# Altium PCB UKU202045.PcbDoc (part 1 of 3)
Units mm, origin at the board's own origin, x right, y up, seen from the top; angles counter-clockwise.
Board outline 319.2 x 161.95 mm, 2 copper layers (Top Layer, Bottom Layer); 290 components, 381 nets, 912 pads, 545 vias.
Unrouted connection lines stored in the file: 1.
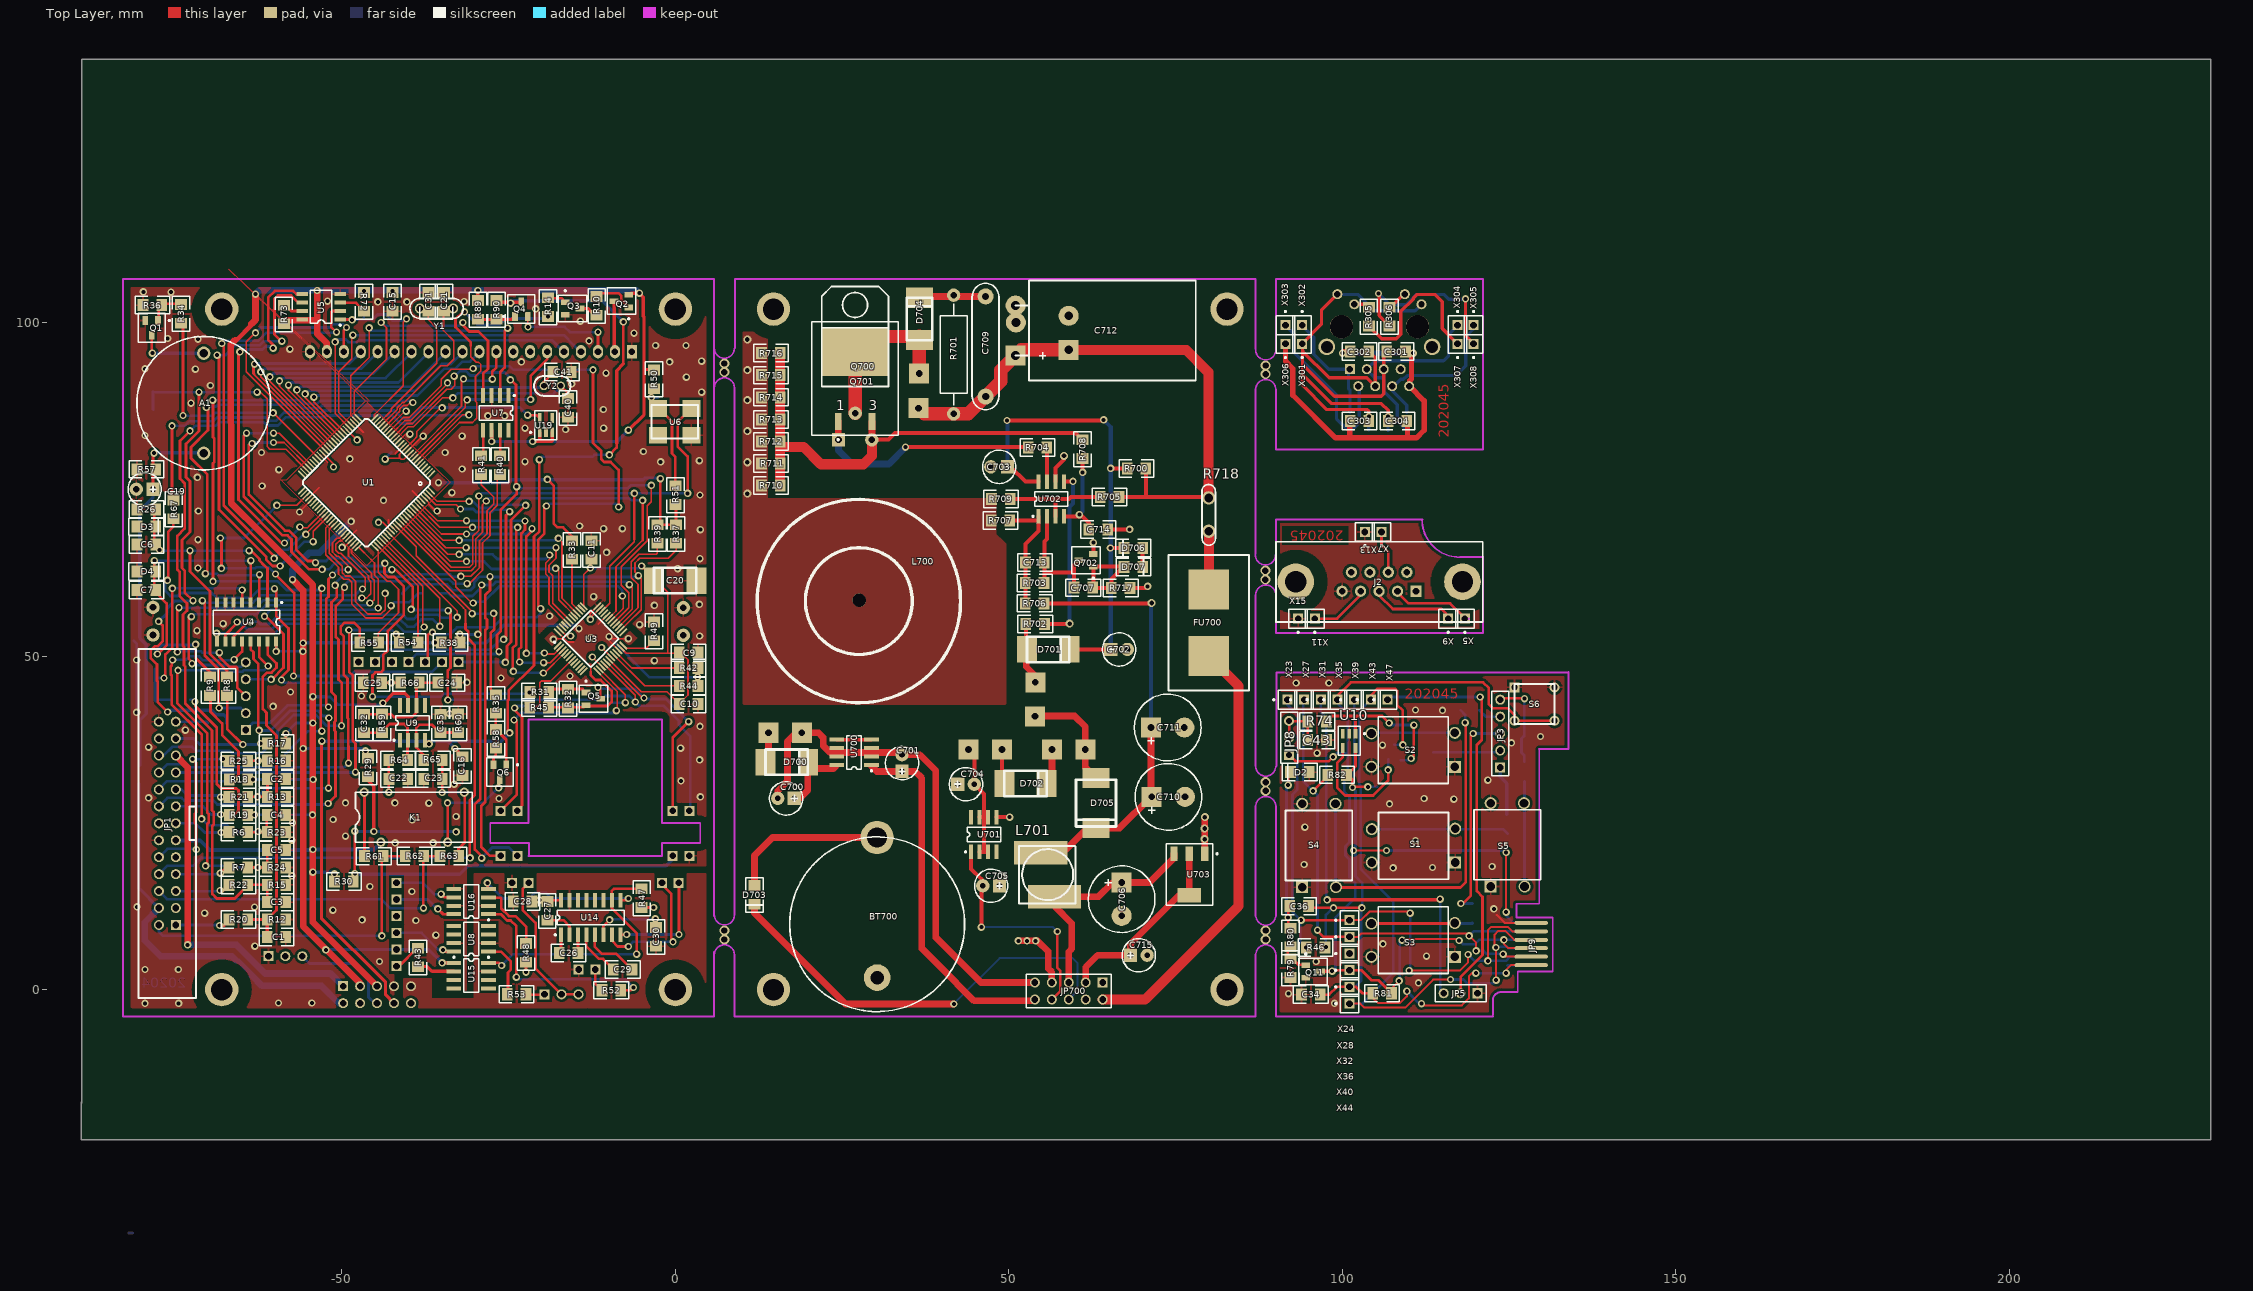
[diagram p0: Top Layer view]
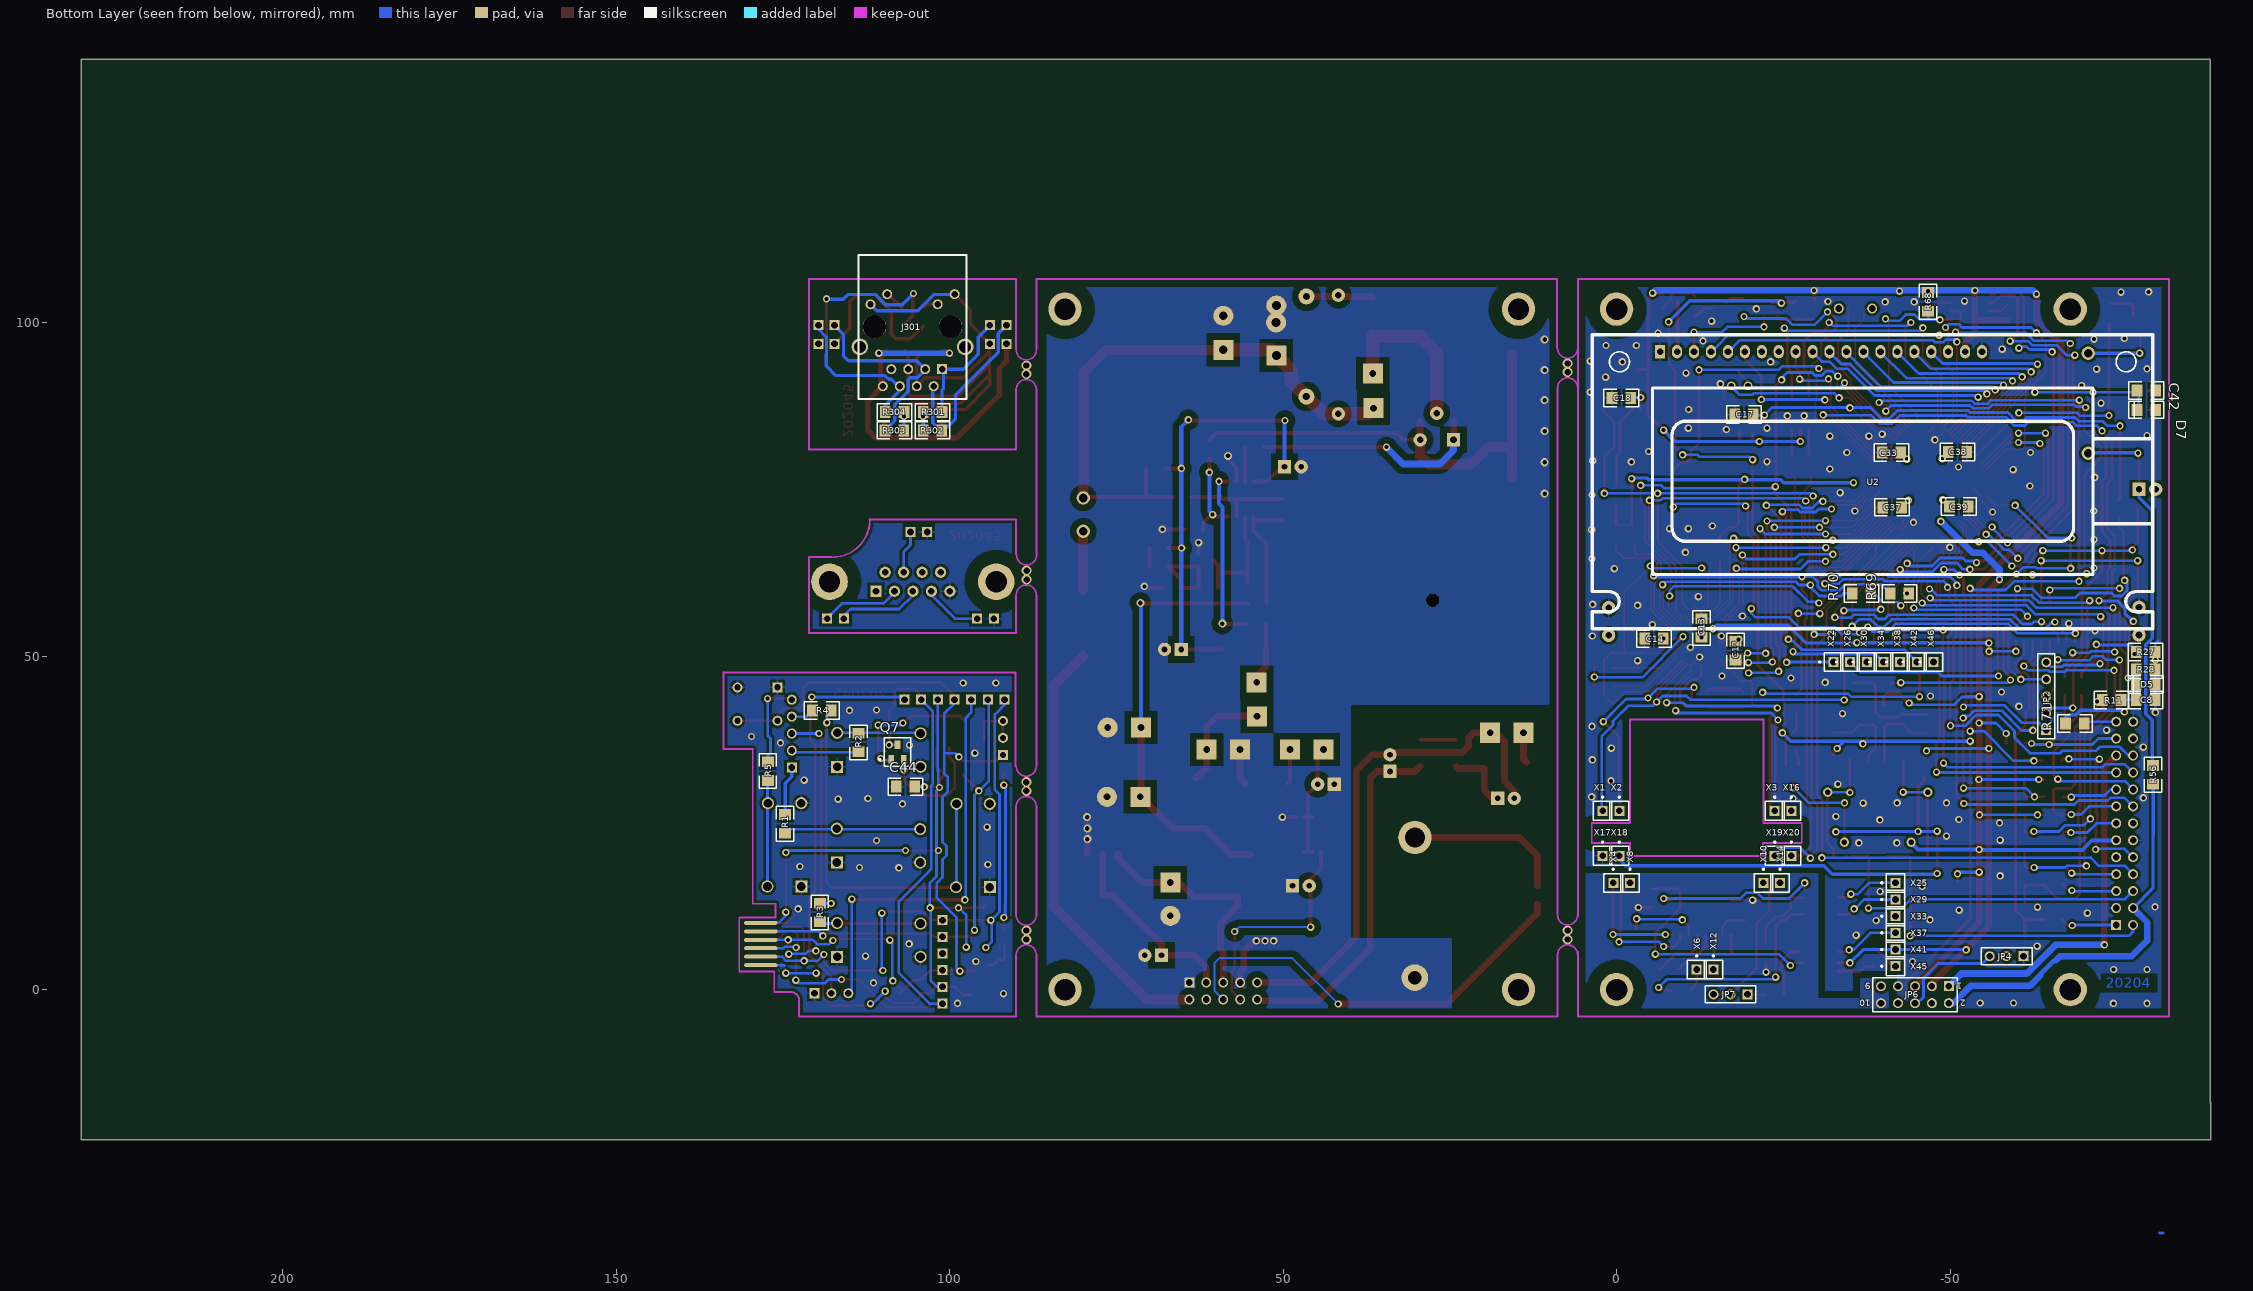
[diagram p1: Bottom Layer view, seen from below]

## Layer stack, top to bottom
Top Layer: signal copper 0.0356
Dielectric: dielectric 0.32, FR-4, Dk 4.8
Bottom Layer: signal copper 0.0356

## Board outline
-88.95,-17.05 -88.95,139.45 230.15,139.45 230.15,-22.5 -89.05,-22.5 -89.05,-16.8

## Design rules (kind name [scope] priority, off if disabled: settings)
Clearance Holes [InPoly vs HasPad('Free-0')  Or HasPad('J2-10')  Or HasPad('J2-11')] p1: gap=2
Clearance Clearance_1 [All vs InPoly and InNet(GND_P)] p2: gap=1
Clearance Poly_Poly [InPoly vs InPoly] p3: gap=1
Clearance Keep_Out [OnLayer('Keep-Out Layer') vs Not (InNet('NetJ2_5') or
InNet('NetC34_1') or
InNet('NetC34_2') or InComponent(JP9))] p4: gap=1
Clearance Poly [InPoly] p5: gap=0.4
Clearance [All] p6: gap=0.15
Clearance "Для разъёма и индикатора" [InComponent(JP1) or InComponent(U2)] p7: gap=0.3
Clearance Высоковольтное [InNet('+UOUT') or
InNet('U1') or
InNet('U2') or
InNet('UAKB') or
InNet('-UOUT') vs InPoly] p8: gap=0.6
ComponentClearance [All] p1: gap=0.254 collisioncheckmode=0
HoleSize [All] p1: absolutevalues=TRUE maxlimit=5 minlimit=0.025 maxpercent=80.000 minpercent=20.000
PolygonConnect PolygonConnect_2 [InNet(GND_P)] p1: connectstyle=Direct reliefconductorwidth=0.254 reliefentries=4 polygonreliefangle="90 Angle"
PolygonConnect PolygonConnect_1 [HasPad('JP101-7') or
HasPad('JP6-7') or
HasPad('JP6-9') or
HasPad('JP6-10')] p2: connectstyle=Direct reliefconductorwidth=0.254 reliefentries=4 polygonreliefangle="90 Angle"
PolygonConnect [All] p3: connectstyle=Relief reliefconductorwidth=0.25 reliefentries=4 polygonreliefangle="90 Angle"
RoutingLayers [All] p1: top layer=Horizontal bottom layer=Vertical
RoutingVias [All] p1: holewidth=0.6 width=1.1 viastyle="Through Hole" minholewidth=0.6 minwidth=1.1 maxholewidth=0.7 maxwidth=1.2
SolderMaskExpansion [All] p1: expansion=0.102
TestPointUsage [All] p1: valid=0 allowmultiple=FALSE
Testpoint [All] p1: side=15 testpointundercomponent=TRUE minsize=1.016 maxsize=2.54 preferedsize=1.524 minholesize=0 maxholesize=1.016 preferedholesize=0.813 testpointgrid=0.025 style=1023 order=-539222988
Width [All] p1: maxlimit=2 minlimit=0.2 preferedwidth=0.254 toplayer_prefwidth=1 bottomlayer_prefwidth=0.4 minimp=50.000000 maximp=50.000000 favimp=50.000000
15 further rules are at their usual default settings.

## Classes and differential pairs
component class IBPV11: A1 C1 C2 C3 C4 C5 C6 C7 C8 C15 C16 C17 C19 C21 C31 C33 C34 C36 C37 C38 C39 C40 C41 C42 C43 C44 D2 D3 D4 D5 D7 JP1 JP2 JP3 JP4 JP5 JP6 JP8 JP9 JP? NetC25_1 NetC29_1 NetC29_2 NetC30_1 NetU4_14 P0_19 P1_3 P1_11 P1_12 Q1 Q2 Q3 Q4 Q7 Q11 R1 R2 R3 R4 R5 R6 R7 R8 R9 R10 R11 R12 R13 R14 R15 R16 R17 R18 R19 R20 R21 R22 R23 R24 R25 R26 R27 R28 R34 R36 R40 R41 R46 R54 R55 R56 R57 R71 R74 R79 R80 R81 R82 R89 R90 S1 S2 S3 S4 S5 S6 U1 U2 U4 U7 U10 U19 UAKB X22 X23 X24 X25 X26 X27 X28 X29 X30 X31 X32 X33 X34 X35 X36 X37 X38 X39 X40 X41 X42 X43 X44 X45 X46 X47 Y1 Y2
component class ETHERNET: C9 C10 C11 C12 C13 C14 C18 C20 C22 C23 C24 C25 C32 C35 K1 Q5 Q6 R29 R30 R31 R32 R33 R35 R37 R38 R39 R42 R44 R45 R49 R50 R51 R58 R59 R60 R61 R62 R63 R64 R65 R66 R67 R69 R70 U3 U6 U9 X1 X2 X3 X16 X17 X18 X19 X20
component class LAN: C301 C302 C303 C304 J301 R301 R302 R303 R304 R305 R306 X301 X302 X303 X304 X305 X306 X307 X308
component class RS232: C26 C27 C28 C29 C30 J2 JP7 R43 R47 R48 R52 R53 R68 R72 R73 U5 U8 U14 U15 U16 X4 X5 X6 X7 X8 X9 X10 X11 X12 X13 X14 X15
component class POWER: BT700 C700 C701 C702 C703 C704 C705 C706 C707 C709 C710 C711 C712 C713 C714 C715 D700 D701 D702 D703 D704 D705 D706 D707 FU700 JP700 L700 L701 Q700 Q701 Q702 R700 R701 R702 R703 R704 R705 R706 R707 R708 R709 R710 R711 R712 R713 R714 R715 R716 R717 R718 U700 U701 U702 U703

## Components (designator, comment, footprint, x,y, rotation, side; value= is the part's Value field where it differs from the comment)
A1 "EFM-260" Pjezo15 -70.7,92.9 r270 top
BT700 "CR2032" BAT_SUPP 30.255,9.8 r0 top (schematic designator BT1)
C1 "1.0" C3216-1206#1 -59.8,7.9 r0 top
C2 "1.0" C3216-1206#1 -59.8,31.6 r0 top
C3 "1.0" C3216-1206#1 -59.8,13.1 r0 top
C4 "1.0" C3216-1206#1 -59.8,26.2 r0 top
C5 "1.0" C3216-1206#1 -59.8,20.9 r0 top
C6 "1.0" C3216-1206#1 -79.3,66.7 r180 top
C7 "1.0" C3216-1206#1 -79.3,59.9 r180 top
C8 "1.0" _1206#1 -79.3,43.4 r180 bottom
C9 "0.1" C3216-1206#2 2,50.5 r0 top
C10 "0.1" C3216-1206#2 2,42.8 r0 top
C11 "0.1" C3216-1206#2 -12.6,65.9 r90 top
C12 "0.1" _1206#1 -17.8,50.8 r270 bottom
C13 "0.1" _1206#1 -12.7,54.2 r90 bottom
C14 "0.1" _1206#1 -5.6,52.6 r0 bottom
C15 "1.0" C3216-1206#3 -42.4,103.1 r90 top
C16 "1.0" C3216-1206#1 -31.9,33.5 r90 top
C17 "1.0" _1206#1 -19.1,86.2 r180 bottom
C18 "0.1" _1206#1 -0.7,88.7 r0 bottom
C19 "22.0x50" el3#1 -78.3,75 r180 top
C20 "10.0x25 tantal" CAP_EL_6_3 -3.2,61.3 r0 top
C21 "10" _1206#1 -34.7,103.1 r270 top
C22 "1.0" _1206#2 -41.55,31.6 r180 top
C23 "1.0" _1206#2 -36.35,31.6 r180 top
C24 "1.0" _1206#2 -34.2,46 r180 top
C25 "1.0" _1206#2 -45.4,46 r0 top
C26 "1.0" C3216-1206#1 -16,5.5 r180 top (schematic designator C27)
C27 "1.0" _1206#3 -19.2,11.8 r90 top (schematic designator C23)
C28 "1.0" C3216-1206#1 -22.9,13.2 r180 top (schematic designator C24)
C29 "1.0" C3216-1206#1 -7.9,3 r0 top (schematic designator C25)
C30 "1.0" C3216-1206#1 -2.9,7.9 r270 top (schematic designator C26)
C31 "10" _1206#1 -37,103.1 r270 top
C32 "0.1" _1206#2 -46.65,39.9 r90 top
C33 "1.0" _1206#1 -41.2,80.5 r180 bottom
C34 "1.0" C3216-1206#1 95.25,-0.75 r0 top
C35 "0.1" _1206#2 -35.2,39.9 r90 top
C36 "1.0" C3216-1206#1 93.5,12.5 r0 top
C37 "1.0" _1206#1 -41.3,72.3 r180 bottom (schematic designator C?)
C38 "1.0" _1206#1 -51.1,80.6 r0 bottom (schematic designator C?)
C39 "1.0" _1206#1 -51.3,72.4 r0 bottom (schematic designator C?)
C40 "33" _1206#1 -16.1,87.2 r90 top
C41 "33" _1206#1 -17,92.6 r180 top
C42 "1n0" _1206#1 -79.4,89.8 r180 bottom (schematic designator C?)
C43 "1.0" _1206#4 96.2,37.4 r180 top
C44 "1.0" _1206#4 106.6,30.4 r0 bottom
C301 "0.1" C3216-1206#1 108.05,95.65 r180 top
C302 "0.1" C3216-1206#1 102.55,95.65 r0 top
C303 "0.1" C3216-1206#1 102.55,85.25 r0 top
C304 "0.1" C3216-1206#1 108.25,85.25 r180 top
C700 "LXZ 22.0x50" el3#2 17.855,28.65 r180 top (schematic designator C1)
C701 "LXZ 22.0x50" el3#3 33.955,32.7 r90 top (schematic designator C2)
C702 "LXZ 22.0x50" el3#2 65.255,51 r0 top (schematic designator C6)
C703 "LXZ 22.0x50" el3#2 49.805,78.35 r180 top (schematic designator C7)
C704 "LXZ 22.0x50" el3#2 42.305,30.8 r0 top (schematic designator C8)
C705 "LXZ 22.0x50" el3#2 48.605,15.55 r180 top (schematic designator C9)
C706 "nichicon 330x16" el5#1 66.905,11.05 r90 top (schematic designator C3)
C707 "0.1" _1206#4 61.155,60.25 r0 top
C709 "0.1x630" c15 46.5,96.4 r270 top (schematic designator C10)
C710 "nichicon 330x16" el5#2 76.405,28.9 r180 top (schematic designator C11)
C711 "nichicon 330x16" el5#2 76.305,39.3 r180 top (schematic designator C12)
C712 "470,0 x 100" el_15_25_h 51,98.8 r270 top (schematic designator C13)
C713 "390" _1206#5 53.905,64.05 r0 top (schematic designator C14)
C714 "1n0" _1206#5 63.405,69 r0 top (schematic designator C15)
C715 "LXZ 22,0 x 50" el3#2 68.205,5.15 r0 top (schematic designator C16)
D2 "LL4148" _1206d#1 93.6,32.6 r0 top
D3 "BZV55-C5V6" _1206d#2 -79.3,69.4 r180 top
D4 "BZV55-C5V6" _1206d#2 -79.3,62.7 r180 top
D5 "BZV55-C5V6" _1206d#2 -79.3,45.7 r180 bottom
D7 "BZV55-C3V9" _1206d#2 -79.4,86.9 r180 bottom (schematic designator D?)
D700 "MBRS1100T3G" D_6_3 19.855,34.1 r180 top (schematic designator D1)
D701 "MBRS1100T3G" D_6_3 59.055,51 r180 top (schematic designator D2)
D702 "MBRS1100T3G" D_6_3 55.655,30.9 r180 top (schematic designator D3)
D703 "LL4148" _1206d#3 11.855,14.2 r90 top (schematic designator D4)
D704 "STTH112" D_6_3 36.6,103.7 r270 top (schematic designator D5)
D705 "30BQ100" 30BQ100 63.055,27.95 r90 top (schematic designator D6)
D706 "BZV55C9V1" _1206d#4 68.652,66.2 r0 top
D707 "BZV55C9V1" _1206d#4 68.652,63.35 r180 top
FU700 "5A(2Б-1В)" FUSE2 79.952,55 r90 top (schematic designator FU1)
J2 "DBS-9M" DSUB_N9 105.55,59.6 r180 top (schematic designator J1)
J301 "J0011D21B" J0011D21B 105.55,99.35 r180 bottom
JP1 "IDC-26" SCM-26 -76.1,24.9 r90 top (schematic designator JP?)
JP2 "PLS-5" HDR1X5 -64.4,38.9 r90 bottom (schematic designator JP3)
JP3 "PLS-5" HDR1X5 123.65,33.3 r90 top (schematic designator JP2)
JP4 "PLS-3" HDR1X3#1 -61,5 r0 bottom (schematic designator JP?)
JP5 "PLS-3" HDR1X3#1 120.25,-0.55 r180 top (schematic designator JP?)
JP6 "Header 10" HDR2X5 -49.8,0.5 r0 bottom
JP7 "PLS-3" HDR1X3#2 -19.6,-0.7 r0 bottom
JP8 "PLS-3" HDR1X3#3 92,35.2 r90 top
JP9 "Header 6X2" sl-12mini 128.3,10 r270 top
JP700 "Header 10" HDR2X5 64.055,1.05 r180 top (schematic designator JP1)
K1 "DH1A" kuan -46.65,22.1 r0 top
L700 "L220-K10" trans_ring1 27.505,58.25 r180 top (schematic designator L1)
L701 "SDR0805-390KL" L10x10 60.905,22.3 r180 top
Q1 "BC846" SO-G3#1 -78.5,99.2 r180 top
Q2 "BC856" SO-G3#2 -8.1,103.2 r90 top
Q3 "BC846" SO-G3#2 -15.4,102.1 r270 top
Q4 "BC856" SO-G3#1 -23.1,102 r0 top
Q5 "BC856" SO-G3#3 -12.3,43.6 r270 top
Q6 "BC846" SO-G3#3 -26.3,32.6 r180 top
Q7 "IRLML2402" SO-G3#2 107.8,35.6 r180 bottom
Q11 "BC846" SO-G3#1 95.6,2.7 r270 top
Q700 "IRF640N" TO220_h 26.955,97.9 r0 top (schematic designator Q1)
Q701 "IRFR220N" SIP-G3/E13 26.955,90.4 r0 top (schematic designator Q2)
Q702 "BC846" SO-G3#2 61.552,64.35 r90 top
R1 "2K7" _1206#3 124.65,24.85 r90 bottom (schematic designator R3)
R2 "2K7" _1206#3 113.65,37.05 r270 bottom (schematic designator R4)
R3 "2K7" _1206#3 119.45,11.55 r90 bottom (schematic designator R6)
R4 "2K7" _1206#3 119.15,41.85 r0 bottom (schematic designator R7)
R5 "2K7" _1206#3 127.25,32.75 r90 bottom (schematic designator R9)
R6 "2K7" _1206#1 -65.5,23.6 r180 top
R7 "2K7" _1206#1 -65.5,18.3 r180 top
R8 "2K7" _1206#1 -67.2,45.5 r270 top
R9 "2K7" _1206#1 -69.8,45.5 r270 top
R10 "2K7" _1206#5 -11.8,102.5 r90 top
R11 "2K7" _1206#1 -74.2,43.4 r0 bottom
R12 "1K0" _1206#1 -59.8,10.5 r0 top
R13 "1K0" _1206#1 -59.8,28.9 r0 top
R14 "2K7" _1206#5 -19.1,102.3 r90 top
R15 "1K0" _1206#1 -59.8,15.7 r0 top
R16 "1K0" _1206#1 -59.8,34.3 r0 top
R17 "1K0" _1206#1 -59.8,36.9 r0 top
R18 "1K0" _1206#1 -65.5,31.5 r0 top
R19 "1K0" _1206#1 -65.5,26.2 r0 top
R20 "33K" _1206#1 -65.5,10.5 r180 top
R21 "33K" _1206#1 -65.5,28.9 r180 top
R22 "33K" _1206#1 -65.5,15.7 r180 top
R23 "10K" _1206#1 -59.8,23.6 r180 top
R24 "10K" _1206#1 -59.8,18.3 r180 top
R25 "10K" _1206#1 -65.5,34.3 r180 top
R26 "10K" _1206#1 -79.3,72 r0 top
R27 "10K" _1206#1 -79.3,50.6 r0 bottom
R28 "10K" _1206#1 -79.3,48 r0 bottom
R29 "1R" _1206#5 -46.1,33.3 r90 top
R30 "1R" _1206#5 -49.7,16.2 r180 top
R31 "1K0" _1206#2 -20.4,44.6 r180 top
R32 "K51" _1206#2 -16.1,43.6 r270 top
R33 "2K2" _1206#2 -15.5,65.9 r90 top
R34 "1K0" _1206#3 -74.1,101.3 r90 top (schematic designator R36)
R35 "1K0" _1206#2 -26.9,42.8 r270 top
R36 "10K" _1206#3 -78.4,102.6 r0 top (schematic designator R16)
R37 "2K2" _1206#2 0.1,68.3 r90 top
R38 "2K2" _1206#2 -33.7,52 r180 top
R39 "2K2" _1206#2 -2.7,68.3 r90 top
R40 "K10" _1206#1 -26.3,78.6 r90 top
R41 "K10" _1206#1 -29.1,78.6 r90 top
R42 "2K2" _1206#2 2,48.2 r0 top
R43 "K20" _1206#3 -38.6,4.8 r270 top (schematic designator R42)
R44 "2K2" _1206#2 2,45.5 r0 top
R45 "10K" _1206#2 -20.4,42.3 r0 top
R46 "1K0" _1206#6 96,6.3 r0 top
R47 "1K0" _1206#3 -5.05,13.7 r90 top (schematic designator R65)
R48 "K20" _1206#3 -22.4,5.5 r270 top (schematic designator R45)
R49 "4K87" _1206#2 -3.2,53.7 r270 top
R50 "1R" _1206#2 -3.2,91.5 r90 top
R51 "1R" _1206#2 0,74.1 r270 top
R52 "1K0" _1206#3 -9.6,-0.1 r180 top (schematic designator R67)
R53 "1K0" _1206#3 -23.8,-0.7 r0 top (schematic designator R68)
R54 "1K0" _1206#2 -40,52 r180 top
R55 "1K0" _1206#2 -45.9,52 r180 top
R56 "10K" _1206#3 -80.4,32.2 r270 bottom
R57 "2K7" _1206#3 -79.3,78 r0 top
R58 "10K" _1206#2 -26.9,37.6 r90 top
R59 "20K" _1206#2 -43.999,39.9 r270 top
R60 "20K" _1206#2 -32.55,39.9 r270 top
R61 "10R" _1206#2 -45.2,20 r0 top
R62 "10R" _1206#2 -39.109,20 r180 top
R63 "10R" _1206#2 -33.9,20 r180 top
R64 "2K0" _1206#2 -41.55,34.4 r0 top
R65 "2K0" _1206#2 -36.35,34.4 r180 top
R66 "20K" _1206#5 -39.8,46 r180 top
R67 "20K" _1206#1 -75.2,72 r90 top (schematic designator R?)
R68 "2K7" _1206#1 -46.7,103.1 r90 bottom
R69 "10R" _1206#1 -42.4,59.4 r0 bottom
R70 "10R" _1206#1 -36.7,59.4 r0 bottom
R71 "2K7" _1206#1 -68.7,39.9 r0 bottom (schematic designator R?)
R72 "2K7" _1206#3 -46.7,103.1 r90 top
R73 "2K7" _1206#3 -58.7,101.2 r90 top
R74 "1K0" _1206#4 96.2,40.2 r180 top
R79 "10K" _1206#3 92.2,3.2 r90 top
R80 "10K" _1206#3 92.2,7.8 r90 top
R81 "10K" _1206#3 105.95,-0.55 r0 top (schematic designator R?)
R82 "10K" _1206#3 99.2,32.2 r180 top
R89 "7K5" _1206#3 -29.6,101.9 r90 top
R90 "2K2" _1206#3 -26.8,101.9 r270 top
R301 "49.9R" _1206#5 102.55,86.55 r0 bottom
R302 "49.9R" _1206#5 102.55,83.85 r180 bottom
R303 "49.9R" _1206#5 108.25,83.85 r180 bottom
R304 "49.9R" _1206#5 108.25,86.55 r0 bottom
R305 "K10" _1206#5 103.95,100.85 r270 top
R306 "K10" _1206#5 107.05,100.85 r270 top
R700 "33K" _1206#7 69.105,78.1 r180 top (schematic designator R1)
R701 "8K2 MF-2" AXIAL-0.7 41.7,95.2 r90 top (schematic designator R2)
R702 "51K" _1206#5 53.955,54.8 r0 top (schematic designator R3)
R703 "M10" _1206#5 53.855,60.95 r180 top (schematic designator R4)
R704 "10" _1206#5 54.305,81.25 r0 top (schematic designator R5)
R705 "33K" _1206#5 65.105,73.85 r0 top (schematic designator R6)
R706 "2K2" _1206#5 53.855,57.9 r180 top (schematic designator R7)
R707 "2K2" _1206#5 48.755,70.3 r0 top (schematic designator R8)
R708 "K51" _1206#5 61.055,81 r270 top (schematic designator R9)
R709 "K20" _1206#5 48.805,73.55 r0 top (schematic designator R10)
R710 "6R8" _1206#5 14.305,75.547 r180 top (schematic designator R11)
R711 "6R8" _1206#5 14.305,78.855 r180 top (schematic designator R12)
R712 "6R8" _1206#5 14.305,82.163 r180 top (schematic designator R13)
R713 "6R8" _1206#5 14.305,85.471 r180 top (schematic designator R14)
R714 "6R8" _1206#5 14.305,88.779 r180 top (schematic designator R15)
R715 "6R8" _1206#4 14.31,92.086 r180 top
R716 "6R8" _1206#4 14.31,95.394 r180 top
R717 "K51" _1206#4 66.752,60.2 r180 top
R718 "NTC  10" JVR07N 79.952,73.7 r270 top
S1 "SWT-9" SWT-9 116.9,19.05 r180 top
S2 "SWT-9" SWT-9 116.85,33.4 r180 top
S3 "SWT-9" SWT-9 116.85,4.9 r180 top
S4 "SWT-9" SWT-9 93.95,15.35 r90 top
S5 "SWT-9" SWT-9 122.22,15.45 r90 top
S6 "SWT-6" SWT-6 125.8,45.3 r0 top
U1 "LPC2368FBD100" LPC2368 -46.3,76 r135 top
U2 "AG1232G" AG1232G -38.4,76.2 r180 bottom (schematic designator U4)
U3 "DP8348C" F-QFP7X7-G48/N -12.7,52.6 r45 top
U4 "MC14051BD" SO-G16/C5.85 -64.3,55.1 r180 top
U5 "25LC640" SO-G8/D5 -53.1,102.35 r90 top
U6 "KXO-97-50MGz" KXO-97 -0.1,85.1 r0 top
U7 "UCC37324" SO-G8#1 -26.9,86.45 r180 top
U8 "MOCD217" SO-G8#1 -30.6,7.6 r90 top
U9 "OP07CS" SO-G8#2 -39.4,40 r0 top
U10 "TPS3823" SO-G5/P.95 101,37.3 r180 top
U14 "MAX232ESE" SO-G16 -12.7,10.8 r0 top
U15 "MOCD217" SO-G8#1 -30.6,2.1 r270 top
U16 "MOCD217" SO-G8#1 -30.6,13.2 r90 top
U19 "TPS76333" SO-G5/P.95 -19.4,84.6 r0 top
U700 "MC78L05ACD" SO-G8#3 26.805,35.55 r90 top (schematic designator U1)
U701 "L79L05ACD" SO-G8#4 46.255,23.25 r0 top (schematic designator U2)
U702 "L6565" so-g8 56.355,73.55 r0 top (schematic designator U3)
U703 "REG1117-3.3" DSO-G3 77.055,17.25 r180 top (schematic designator U4)
X1 "" PIN1 2.1,26.8 r180 bottom
X2 "" PIN1 -0.4,26.8 r180 bottom
X3 "" PIN1 -23.7,26.8 r180 bottom
X4 "" PIN1 0.5,16 r180 bottom (schematic designator X?)
X5 "" PIN1 118.35,55.6 r180 top (schematic designator X?)
X6 "" PIN1 -12,3 r180 bottom (schematic designator X?)
X7 "" PIN1 105.85,68.6 r180 top (schematic designator X?)
X8 "" PIN1 -2,16 r180 bottom (schematic designator X?)
X9 "" PIN1 115.85,55.6 r180 top (schematic designator X?)
X10 "" PIN1 -22,16 r180 bottom (schematic designator X?)
X11 "" PIN1 95.85,55.6 r180 top (schematic designator X?)
X12 "" PIN1 -14.5,3 r180 bottom (schematic designator X?)
X13 "" PIN1 103.35,68.6 r180 top (schematic designator X?)
X14 "" PIN1 -24.5,16 r180 bottom
X15 "" PIN1 93.35,55.6 r180 top
X16 "" PIN1 -26.2,26.8 r180 bottom
X17 "" PIN1 2.1,20.05 r180 bottom
X18 "" PIN1 -0.4,20.05 r180 bottom
X19 "" PIN1 -23.7,20.05 r180 bottom
X20 "" PIN1 -26.2,20.05 r180 bottom
X22 "" PIN1 -32.5,49.1 r90 bottom
X23 "" PIN1 91.75,43.45 r90 top
X24 "" PIN1 101.05,10.4 r90 top
X25 "" PIN1 -41.8,16 r90 bottom
X26 "" PIN1 -35,49.1 r90 bottom
X27 "" PIN1 94.25,43.45 r90 top
X28 "" PIN1 101.05,7.9 r90 top
X29 "" PIN1 -41.8,13.5 r90 bottom
X30 "" PIN1 -37.5,49.1 r90 bottom
X31 "" PIN1 96.75,43.45 r90 top
X32 "" PIN1 101.05,5.4 r90 top
X33 "" PIN1 -41.8,11 r90 bottom
X34 "" PIN1 -40,49.1 r90 bottom
X35 "" PIN1 99.25,43.45 r90 top
X36 "" PIN1 101.05,2.9 r90 top
X37 "" PIN1 -41.8,8.5 r90 bottom
X38 "" PIN1 -42.5,49.1 r90 bottom
X39 "" PIN1 101.75,43.45 r90 top
X40 "" PIN1 101.05,0.4 r90 top
X41 "" PIN1 -41.8,6 r90 bottom
X42 "" PIN1 -45,49.1 r90 bottom
X43 "" PIN1 104.25,43.45 r90 top
X44 "" PIN1 101.05,-2.1 r90 top
X45 "" PIN1 -41.8,3.5 r90 bottom
X46 "" PIN1 -47.5,49.1 r90 bottom
X47 "" PIN1 106.75,43.45 r90 top
X301 "" PIN1 93.95,96.8 r180 top
X302 "" PIN1 93.95,99.6 r0 top
X303 "" PIN1 91.45,99.6 r0 top
X304 "" PIN1 117.25,99.6 r0 top
X305 "" PIN1 119.65,99.6 r0 top
X306 "" PIN1 91.45,96.8 r180 top
X307 "" PIN1 117.25,96.8 r180 top
X308 "" PIN1 119.65,96.8 r180 top
Y1 "10MGz" QWARZ1 -33.3,102.1 r180 top
Y2 "32768" QWARZ2 -17.2,90.5 r180 top

## Footprints (in the part's own frame and the unit in brackets; to place one, negate y for a bottom-side part, rotate by r counter-clockwise, add the part's x,y. Pads: shape width x height; smd on the part's side, far side on the other; paste and mask are expansions set on the pad)
30BQ100 [mm]
  rect 3x4 smd: 1(3.75,0) 2(-3.75,0)
  silkscreen extent -3.5,-3 3.5,3
_1206#1 [mm]
  rect 1.6x1.8 smd: 1(-1.397,0.003) 2(1.403,0.003)
  silkscreen extent -2.6,-1.3 2.6,1.3
_1206#2 [mm]
  rect 1.6x1.8 smd: 1(-1.409,-0.004) 2(1.391,-0.004)
  silkscreen extent -2.61,-1.3 2.59,1.3
_1206#3 [mm]
  rect 1.6x1.8 smd: 1(-1.4,0) 2(1.4,0)
  silkscreen extent -2.6,-1.3 2.6,1.3
_1206#4 [mm]
  rect 1.6x1.8 smd: 1(-1.408,-0.007) 2(1.392,-0.007)
  silkscreen extent -2.61,-1.31 2.59,1.29
_1206#5 [mm]
  rect 1.6x1.8 smd: 1(-1.412,-0.007) 2(1.388,-0.007)
  silkscreen extent -2.61,-1.31 2.59,1.29
_1206#6 [mm]
  rect 1.6x1.8 smd: 1(-1.421,-0.006) 2(1.379,-0.006)
  silkscreen extent -2.62,-1.31 2.58,1.29
_1206#7 [mm]
  rect 1.6x1.8 smd: 1(-1.419,0.001) 2(1.382,0.001)
  silkscreen extent -2.62,-1.3 2.58,1.3
_1206d#1 [mm]
  rect 1.6x1.8 smd: 1(1.4,0) 2(-1.4,0)
  silkscreen extent -2.6,-1.3 2.6,1.3
_1206d#2 [mm]
  rect 1.6x1.8 smd: 1(1.405,0.012) 2(-1.395,0.012)
  silkscreen extent -2.6,-1.29 2.6,1.31
_1206d#3 [mm]
  rect 1.6x1.8 smd: 1(1.395,-0.009) 2(-1.405,-0.009)
  silkscreen extent -2.6,-1.31 2.6,1.29
_1206d#4 [mm]
  rect 1.6x1.8 smd: 1(1.397,-0.001) 2(-1.403,-0.001)
  silkscreen extent -2.6,-1.3 2.6,1.3
AG1232G [mm]
  rect 1.5x2 hole 1: 1(-31.877,19.431)
  oval 1.5x2 hole 1: 2(-29.337,19.431) 3(-26.797,19.431) 4(-24.257,19.431) 5(-21.717,19.431) 6(-19.177,19.431) 7(-16.637,19.431) 8(-14.097,19.431) 9(-11.557,19.431) 10(-9.017,19.431) 11(-6.477,19.431) 12(-3.937,19.431) 13(-1.397,19.431) 14(1.143,19.431) 15(3.683,19.431) 16(6.223,19.431) 17(8.763,19.431) 18(11.303,19.431) 19(13.843,19.431) 20(16.383,19.431)
  silkscreen extent -42.04,-22.1 41.96,21.97
AXIAL-0.7 [mm]
  round 2 hole 1: 1(-8.887,-0.008) 2(8.893,-0.008)
  silkscreen extent -7.62,-2.04 7.62,2.02
BAT_SUPP [mm]
  round 5 hole 3: 1(-0.009,12.995)
  round 4 hole 2: 2(-0.009,-8.005)
  silkscreen extent -13.11,-13.1 13.09,13.09
c15 [mm]
  round 2.4 hole 1.1: 1(-7.5,0)
  round 2.4 hole 1.11: 2(7.5,0)
  silkscreen extent -9.48,-2 9.48,2
C3216-1206#1 [mm]
  rect 1.6x1.8 smd: 1(-1.4,0) 2(1.4,0)
  silkscreen extent -2.6,-1.3 2.6,1.3
C3216-1206#2 [mm]
  rect 1.6x1.8 smd: 1(-1.412,-0.002) 2(1.388,-0.002)
  silkscreen extent -2.61,-1.3 2.59,1.3
C3216-1206#3 [mm]
  rect 1.6x1.8 smd: 1(-1.402,0.006) 2(1.398,0.006)
  silkscreen extent -2.6,-1.29 2.6,1.31
CAP_EL_6_3 [mm]
  rect 3x4 smd: 1(-0.011,0.006) 2(6.339,0.006)
  silkscreen extent -0.01,-1.9 6.34,1.91
D_6_3 [mm]
  rect 3x4 smd: 1(6.341,0.006) 2(-0.009,0.006)
  silkscreen extent -0.01,-1.9 6.34,1.91
DSO-G3 [mm]
  rect 1.1x2.15 smd: 1(-2.3,-3.1) 2(0,-3.1) 3(2.3,-3.1)
  rect 3.5x2.15 smd: 4(0,3.1)
  silkscreen extent -4.27,-4.6 3.5,4.6
DSUB_N9 [mm]
  rect 1.69x1.69 hole 1: 1(-5.481,-0.116)
  round 1.69 hole 1: 2(-2.711,-0.116) 3(0.059,-0.116) 4(2.829,-0.116) 5(5.599,-0.116) 6(-4.096,-2.956) 7(-1.326,-2.956) 8(1.444,-2.956) 9(4.214,-2.956)
  round 5.5 hole 3.2: 10(-12.436,-1.536) 11(12.554,-1.536)
  silkscreen extent -15.49,-7.51 15.51,4.49
el3#1 [mm]
  rect 2x2 hole 0.95: 1(0,0)
  round 2 hole 0.95: 2(2.5,0)
  silkscreen extent -1.25,-2.5 3.75,2.5
el3#2 [mm]
  rect 2x2 hole 0.85: 1(0.011,-0.008)
  round 2 hole 0.85: 2(2.511,-0.008)
  silkscreen extent -1.24,-2.51 3.76,2.49
el3#3 [mm]
  rect 2x2 hole 0.85: 1(0.004,-0.019)
  round 2 hole 0.85: 2(2.504,-0.019)
  silkscreen extent -1.25,-2.52 3.75,2.48
el5#1 [mm]
  rect 3x3 hole 1: 1(5.001,0.007)
  round 3 hole 1: 2(0.001,0.007)
  silkscreen extent -2.5,-4.99 7.5,5
el5#2 [mm]
  rect 3x3 hole 1: 1(5.005,0.014)
  round 3 hole 1: 2(0.005,0.014)
  silkscreen extent -2.5,-4.99 7.5,5.01
el_15_25_h [mm]
  rect 3x3 hole 1.3: 1(3.75,0)
  round 3 hole 1.3: 2(-3.75,0)
  silkscreen extent -7.5,0 7.5,27
F-QFP7X7-G48/N [mm]
  rect 1.55x0.3 smd: 1(-4.192,2.749) 2(-4.192,2.249) 3(-4.192,1.749) 4(-4.192,1.249) 5(-4.192,0.749) 6(-4.192,0.249) 7(-4.192,-0.251) 8(-4.192,-0.751) 9(-4.192,-1.251) 10(-4.192,-1.751) 11(-4.192,-2.251) 12(-4.192,-2.751) 25(4.158,-2.751) 26(4.158,-2.251) 27(4.158,-1.751) 28(4.158,-1.251) 29(4.158,-0.751) 30(4.158,-0.251) 31(4.158,0.249) 32(4.158,0.749) 33(4.158,1.249) 34(4.158,1.749) 35(4.158,2.249) 36(4.158,2.749)
  rect 0.3x1.55 smd: 13(-2.767,-4.176) 14(-2.267,-4.176) 15(-1.767,-4.176) 16(-1.267,-4.176) 17(-0.767,-4.176) 18(-0.267,-4.176) 19(0.233,-4.176) 20(0.733,-4.176) 21(1.233,-4.176) 22(1.733,-4.176) 23(2.233,-4.176) 24(2.733,-4.176) 37(2.733,4.174) 38(2.233,4.174) 39(1.733,4.174) 40(1.233,4.174) 41(0.733,4.174) 42(0.233,4.174) 43(-0.267,4.174) 44(-0.767,4.174) 45(-1.267,4.174) 46(-1.767,4.174) 47(-2.267,4.174) 48(-2.767,4.174)
  silkscreen extent -4.32,-3 2.98,3.57
FUSE2 [mm]
  rect 6x6 smd: 1(-4.999,-0.006) 2(5.001,-0.006)
  silkscreen extent -10.16,-6.01 10.16,5.99
HDR1X3#1 [mm]
  rect 1.5x1.5 hole 1: 1(0,0)
  round 1.5 hole 1: 2(2.54,0) 3(5.08,0)
  silkscreen extent -1.27,-1.27 6.35,1.27
HDR1X3#2 [mm]
  rect 1.5x1.5 hole 1: 1(-0.009,0.011)
  round 1.5 hole 1: 2(2.531,0.011) 3(5.071,0.011)
  silkscreen extent -1.28,-1.26 6.34,1.28
HDR1X3#3 [mm]
  rect 1.5x1.5 hole 0.9: 1(0,0)
  round 1.5 hole 0.9: 2(2.54,0) 3(5.08,0)
  silkscreen extent -1.27,-1.27 6.35,1.27
HDR1X5 [mm]
  rect 1.5x1.5 hole 1: 1(0,0)
  round 1.5 hole 1: 2(2.54,0) 3(5.08,0) 4(7.62,0) 5(10.16,0)
  silkscreen extent -1.27,-1.27 11.43,1.27
HDR2X5 [mm]
  rect 1.5x1.5 hole 1: 1(0,0)
  round 1.5 hole 1: 2(0,2.54) 3(2.54,0) 4(2.54,2.54) 5(5.08,0) 6(5.08,2.54) 7(7.62,0) 8(7.62,2.54) 9(10.16,0) 10(10.16,2.54)
  silkscreen extent -1.27,-1.27 11.43,3.81
J0011D21B [mm]
  round 2.5 hole 1.8: 0(-7.9,-3) 0(7.9,-3)
  round 3.5 hole 3.5: 0(-5.7,0) 0(5.7,0)
  rect 1.5x1.5 hole 0.95: 1(4.445,-6.35)
  round 1.5 hole 0.95: 2(3.175,-8.9) 3(1.905,-6.35) 4(0.635,-8.9) 5(-0.635,-6.35) 6(-1.905,-8.9) 7(-3.175,-6.35) 8(-4.445,-8.9) 9(6.31,4.9) 10(3.77,3.38) 11(-3.8,4.9) 12(-6.31,3.38)
  silkscreen extent -8.1,-10.8 8.1,10.8
JVR07N [mm]
  round 2 hole 1.3: 1(-0.004,-0.002) 2(4.996,-0.002)
  silkscreen extent -2.02,-1.02 7.09,1.01
kuan [mm]
  round 1.4 hole 0.85: 1(15.006,7.49) 3(0.006,7.49) 4(2.506,-0.01) 5(12.506,-0.01)
  silkscreen extent -1.34,-0.01 16.21,7.49
KXO-97 [mm]
  rect 2.7x2.5 smd: 1(-2.5,-2) 2(2.5,-2) 3(2.5,2) 4(-2.5,2)
  silkscreen extent -3.5,-2.5 3.5,2.5
L10x10 [mm]
  rect 8x3.5 smd: 1(4.075,8.372) 2(6.107,1.768)
  silkscreen extent 0.9,0.75 9.41,9.39
LPC2368 [mm]
  rect 0.25x1.5 smd: 1(-6,-7.775)
  oval 0.25x1.5 smd: 2(-5.5,-7.75) 3(-5,-7.75) 4(-4.5,-7.75) 5(-4,-7.75) 6(-3.5,-7.75) 7(-3,-7.75) 8(-2.5,-7.75) 9(-2,-7.75) 10(-1.5,-7.75) 11(-1,-7.75) 12(-0.5,-7.75) 13(0,-7.75) 14(0.5,-7.75) 15(1,-7.75) 16(1.5,-7.75) 17(2,-7.75) 18(2.5,-7.75) 19(3,-7.75) 20(3.5,-7.75) 21(4,-7.75) 22(4.5,-7.75) 23(5,-7.75) 24(5.5,-7.75) 25(6,-7.75) 51(6,7.75) 52(5.5,7.75) 53(5,7.75) 54(4.5,7.75) 55(4,7.75) 56(3.5,7.75) 57(3,7.75) 58(2.5,7.75) 59(2,7.75) 60(1.5,7.75) 61(1,7.75) 62(0.5,7.75) 63(0,7.75) 64(-0.5,7.75) 65(-1,7.75) 66(-1.5,7.75) 67(-2,7.75) 68(-2.5,7.75) 69(-3,7.75) 70(-3.5,7.75) 71(-4,7.75) 72(-4.5,7.75) 73(-5,7.75) 74(-5.5,7.75) 75(-6,7.75)
  oval 1.5x0.25 smd: 26(7.75,-6) 27(7.75,-5.5) 28(7.75,-5) 29(7.75,-4.5) 30(7.75,-4) 31(7.75,-3.5) 32(7.75,-3) 33(7.75,-2.5) 34(7.75,-2) 35(7.75,-1.5) 36(7.75,-1) 37(7.75,-0.5) 38(7.75,0) 39(7.75,0.5) 40(7.75,1) 41(7.75,1.5) 42(7.75,2) 43(7.75,2.5) 44(7.75,3) 45(7.75,3.5) 46(7.75,4) 47(7.75,4.5) 48(7.75,5) 49(7.75,5.5) 50(7.75,6) 76(-7.75,6) 77(-7.75,5.5) 78(-7.75,5) 79(-7.775,4.475) 80(-7.75,4) 81(-7.75,3.5) 82(-7.75,3) 83(-7.75,2.5) 84(-7.75,2) 85(-7.75,1.5) 86(-7.75,1) 87(-7.75,0.5) 88(-7.75,0) 89(-7.75,-0.5) 90(-7.75,-1) 91(-7.75,-1.5) 92(-7.75,-2) 93(-7.75,-2.5) 94(-7.775,-3.025) 95(-7.75,-3.5) 96(-7.75,-4) 97(-7.75,-4.5) 98(-7.75,-5) 99(-7.75,-5.5) 100(-7.75,-6)
  silkscreen extent -6.92,-6.93 6.93,6.93
PIN1 [mm]
  rect 1.5x1.5 hole 1: 1(0,0)
  silkscreen extent -1.4,-1.4 1.4,2.17
Pjezo15 [mm]
  round 2 hole 1.3: 1(-2.5,0) 2(12.5,0)
  silkscreen extent -5.01,-10.01 15.01,10.01
QWARZ1 [mm]
  round 1.5 hole 1: 1(0,0) 2(5,0)
  silkscreen extent -1.5,-1.5 6.5,1.5
QWARZ2 [mm]
  round 1.3 hole 0.85: 1(0,0) 2(2.5,0)
  silkscreen extent -1.5,-1.5 4,1.5
SCM-26 [mm]
  rect 1.5x1.5 hole 1: 1(-15.215,-1.22)
  round 1.5 hole 1: 2(-15.215,1.32) 3(-12.675,-1.22) 4(-12.675,1.32) 5(-10.135,-1.22) 6(-10.135,1.32) 7(-7.595,-1.22) 8(-7.595,1.32) 9(-5.055,-1.22) 10(-5.055,1.32) 11(-2.515,-1.22) 12(-2.515,1.32) 13(0.025,-1.22) 14(0.025,1.32) 15(2.565,-1.22) 16(2.565,1.32) 17(5.105,-1.22) 18(5.1,1.325) 19(7.645,-1.22) 20(7.645,1.32) 21(10.185,-1.22) 22(10.185,1.32) 23(12.725,-1.22) 24(12.725,1.32) 25(15.265,-1.22) 26(15.25,1.325)
  silkscreen extent -26.13,-4.25 26.19,4.35
SIP-G3/E13 [mm]
  rect 1x2.6 smd: 1(-2.551,-5.246) 3(2.529,-5.246)
  rect 10.2x7.3 smd: 4(-0.011,5.254)
  silkscreen extent -6.51,-8.1 6.49,9.68
sl-12mini [mm]
  oval 0.6x5 smd: 1(0,0) 3(1.275,0) 5(2.55,0) 7(3.8,0) 9(5.075,0) 11(6.35,0)
  oval 0.6x5 smd far side: 2(0,0) 4(1.275,0) 6(2.55,0) 8(3.8,0) 10(5.075,0) 12(6.35,0)
SO-G3#1 [mm]
  rect 0.85x1.3 smd: 1(-0.95,-1.1) 2(0.95,-1.1) 3(0,1.1)
  silkscreen extent -2.78,-2.15 2,2.15
SO-G3#2 [mm]
  rect 0.85x1.3 smd: 1(-0.948,-1.102) 2(0.952,-1.102) 3(0.002,1.098)
  silkscreen extent -2.77,-2.15 2,2.15
SO-G3#3 [mm]
  rect 0.85x1.3 smd: 1(-0.946,-1.096) 2(0.954,-1.096) 3(0.004,1.104)
  silkscreen extent -2.77,-2.15 2,2.15
SO-G5/P.95 [mm]
  rect 0.55x1.45 smd: 1(-0.95,-1.075) 2(0,-1.075) 3(0.95,-1.075) 4(0.95,1.075) 5(-0.95,1.075)
  silkscreen extent -2.43,-2.2 1.65,2.2
SO-G8#1 [mm]
  rect 0.6x2.2 smd: 1(-1.905,-2.6) 2(-0.635,-2.6) 3(0.635,-2.6) 4(1.905,-2.6) 5(1.905,2.6) 6(0.635,2.6) 7(-0.635,2.6) 8(-1.905,2.6)
  silkscreen extent -2.88,-2.72 2.5,1.1
SO-G8#2 [mm]
  rect 0.6x2.2 smd: 1(-1.915,-2.62) 2(-0.645,-2.62) 3(0.625,-2.62) 4(1.895,-2.62) 5(1.895,2.58) 6(0.625,2.58) 7(-0.645,2.58) 8(-1.915,2.58)
  silkscreen extent -2.89,-2.75 2.49,1.08
SO-G8#3 [mm]
  rect 0.6x2.2 smd: 1(-1.907,-2.587) 2(-0.637,-2.587) 3(0.633,-2.587) 4(1.903,-2.587) 5(1.903,2.613) 6(0.633,2.613) 7(-0.637,2.613) 8(-1.907,2.613)
  silkscreen extent -2.88,-2.71 2.5,1.11
SO-G8#4 [mm]
  rect 0.6x2.2 smd: 1(-1.902,-2.611) 2(-0.632,-2.611) 3(0.638,-2.611) 4(1.908,-2.611) 5(1.908,2.589) 6(0.638,2.589) 7(-0.632,2.589) 8(-1.902,2.589)
  silkscreen extent -2.88,-2.74 2.5,1.09
so-g8 [mm]
  rect 0.6x2.2 smd: 1(-1.902,-2.611) 2(-0.632,-2.611) 3(0.638,-2.611) 4(1.908,-2.611) 5(1.908,2.589) 6(0.638,2.589) 7(-0.632,2.589) 8(-1.902,2.589)
  silkscreen extent -2.88,-2.74 2.5,1.09
SO-G8/D5 [mm]
  rect 0.6x1.7 smd: 1(-1.905,-2.85) 2(-0.635,-2.85) 3(0.635,-2.85) 4(1.905,-2.85) 5(1.905,2.85) 6(0.635,2.85) 7(-0.635,2.85) 8(-1.905,2.85)
  silkscreen extent -2.88,-2.97 2.5,1.6
SO-G16 [mm]
  rect 0.6x2.2 smd: 1(-4.445,-2.6) 2(-3.175,-2.6) 3(-1.905,-2.6) 4(-0.635,-2.6) 5(0.635,-2.6) 6(1.905,-2.6) 7(3.175,-2.6) 8(4.445,-2.6) 9(4.445,2.6) 10(3.175,2.6) 11(1.905,2.6) 12(0.635,2.6) 13(-0.635,2.6) 14(-1.905,2.6) 15(-3.175,2.6) 16(-4.445,2.6)
  silkscreen extent -5.42,-2.72 5,1.1
SO-G16/C5.85 [mm]
  rect 0.6x1.55 smd: 1(-4.445,-2.925) 2(-3.175,-2.925) 3(-1.905,-2.925) 4(-0.635,-2.925) 5(0.635,-2.925) 6(1.905,-2.925) 7(3.175,-2.925) 8(4.445,-2.925) 9(4.445,2.925) 10(3.175,2.925) 11(1.905,2.925) 12(0.635,2.925) 13(-0.635,2.925) 14(-1.905,2.925) 15(-3.175,2.925) 16(-4.445,2.925)
  silkscreen extent -5.39,-3.05 5,1.75
SWT-6 [mm]
  rect 1.5x1.5 hole 0.95: 1(-0.009,-0.001)
  round 1.5 hole 0.95: 1(5.991,-0.001) 2(-0.009,-5.001) 2(5.991,-5.001)
  silkscreen extent -0.01,-5.5 5.99,0.5
SWT-9 [mm]
  rect 1.8x1.8 hole 1.3: 1(0,0)
  round 1.8 hole 1.3: 1(12.5,0) 2(0,-5.08) 2(12.5,-5)
  silkscreen extent 1,-7.5 11.5,2.5
TO220_h [mm]
  rect 2x2 hole 1: 1(-2.5,-15.5)
  round 2 hole 1: 2(0,-11.5) 3(2.5,-15.5)
  silkscreen extent -5,-7.5 5,7.5
trans_ring1 [mm]
  rect 3x3 hole 1: 1(-8.95,-28.9) 2(-9.05,-34.1) 3(-26.407,17.289) 4(-26.45,12.2) 5(-16.45,22.25) 6(-21.45,22.25) 8(-33.95,22.25) 9(8.55,19.75) 10(13.55,19.75)
  rect 3x3 hole 1 unplated: 7(-28.95,22.25)
  silkscreen extent -15.24,-15.23 15.24,15.25

## Part data
A1: library part PJEZ0
BT700: library part Battery, "Multicell Battery"
C1 C2 C3 C4 C5 C6 C7 C8 C9 C10 C11 C12 C13 C14 C15 C16 C17 C18 C21 C22 C23 C24 C25 C26 C27 C28 C29 C30 C31 C32 C33 C34 C35 C36 C37 C38 C39 C40 C41 C42 C301 C302 C303 C304 C706 C707 C709 C713 C714: library part "Cap Semi", "Capacitor (Semiconductor SIM Model)"
C19 C20 C700 C701 C702 C703 C704 C705 C710 C711 C712 C715: library part "Cap Pol1", "Polarized Capacitor (Radial)"
C43 C44: library part "Cap Semi", "Capacitor"
D2 D703: library part Diode, "Default Diode"
D3 D4 D5 D7 D706 D707: library part "D Zener", "Zener Diode"
D700 D701 D702 D705: library part 10BQ015, "Schottky Rectifier"
D704: library part 10BQ015, "Schottky Diode"
FU700: library part FUSE
J2: library part "D Connector 9", "Receptacle Assembly, 9 Position, Right Angle"
JP1: library part MHDR2X13, "Header, 13-Pin, Dual row"
JP2 JP3 JP4 JP5: library part "Header 2", "Header, 2-Pin"
JP6: library part "Header 20", "Header, 20-Pin"
JP7 JP8: library part "Header 3", "Header, 3-Pin"
JP9: "Header, 6-Pin, Dual row"
JP700: "Header, 10-Pin"
K1: library part BS115, "Single-Pole Dual-Throw Relay"
L700: library part L1_dc_2, "Дроссель"
L701: library part "Inductor Konstr 2", "Magnetic-Core Inductor"
Q1 Q6 Q11: library part GT122
Q2 Q4 Q5: library part GT109
Q3: library part BC847ALT1, "General Purpose Transistor NPN Silicon"
Q7: "HEXFET Power MOSFET"
Q700 Q701: library part NMOS-2, "N-Channel Power MOSFET"
Q702: library part GT122, "Bipolar transistor"
R1 R2 R3 R4 R5 R6 R7 R8 R9 R10 R11 R12 R13 R14 R15 R16 R17 R18 R19 R20 R21 R22 R23 R24 R25 R26 R27 R28 R29 R30 R31 R32 R33 R34 R35 R36 R37 R38 R39 R40 R41 R42 R43 R44 R45 R46 R47 R48 R49 R50 R51 R52 R53 R54 R55 R56 R57 R58 R59 R60 R61 R62 R63 R64 R65 R66 R67 R68 R69 R70 R71 R72 R73 R74 R79 R80 R81 R82 R89 R90 R301 R302 R303 R304 R305 R306 R700 R701 R702 R703 R704 R705 R706 R707 R708 R709 R710 R711 R712 R713 R714 R715 R716 R717: library part Res2, "Resistor"
R718: library part "Res Varistor", "Varistor (Voltage-Sensitive Resistor)"
S1 S2 S3 S4 S5: "Switch"
S6: library part SWT-9, "Button"
U4: "8-Channel Analog Multiplexer/Demultiplexer"
U6: library part KXO-97
U9: "Ultra-Low Offset Voltage Operational Amplifier"
U10: "Reset IC"
U14: "+5V Powered, Multi-Channel RS-232 Driver/Receiver"
U19: library part LP2980AIM5-3.3, "Micropower SOT, 50 mA Ultra Low-Dropout Regulator"
U700: "3-Terminal Low-Current Positive Fixed Voltage Regulator"
U701: "Negative Voltage Regulator"
U703: "800mA and 1A Low Dropout Positive Regulator 2.85V, 3.3V, 5V, and Adjustable"
X1 X2 X3 X4 X5 X6 X7 X8 X9 X10 X11 X12 X13 X14 X15 X16 X17 X18 X19 X20 X22 X23 X24 X25 X26 X27 X28 X29 X30 X31 X32 X33 X34 X35 X36 X37 X38 X39 X40 X41 X42 X43 X44 X45 X46 X47 X301 X302 X303 X304 X305 X306 X307 X308: library part Socket, "Socket"
Y1 Y2: library part XTAL, "Crystal Oscillator"

## Free pads (board coordinates)
  round 5 hole 3.2: 0(-68,0) 0(-68,102) 0(0,0) 0(0,102) 0(14.7,102) 0(14.7,0) 0(82.7,0) 0(82.7,102)
  round 3 hole 1.3: 0(51.05,100) 1(58.952,101)
  round 2 hole 2: 1(27.555,58.35)
  rect 3x3 hole 1.3: 2(58.952,95.9)
  round 2 hole 1: 4(1.2,57.25) 9(-78.3,53.15) 9(-78.3,57.3) 9(1.2,53.1)

## Via types
v1: diameter 1.1, hole 0.6, Top Layer to Bottom Layer, 521 vias
v2: diameter 1.2, hole 0.7, Top Layer to Bottom Layer, 12 vias
v3: diameter 1.5, hole 0.95, Top Layer to Bottom Layer, 12 vias

## Nets (pads, with @x,y where several pads share a name; then routed paths per layer and width w, separated by ;. In a path a pad name is that pad's centre, name@x,y a point inside that pad or via, vN(x,y) a via of type N, cw(c..) or ccw(c..) an arc to the next point about the centre after c; other vN are vias at no path point)
+3V3: C12.1 C13.1 C14.1 C37.2 C38.2 C39.2 JP6.3 Q5.2 R29.2 R32.2 R33.2 R37.2 R38.2 R39.2 R42.2 R44.2 R45.2 R51.2 U1.13 U1.28 U1.42 U1.54 U1.71 U1.84 U1.96 U3.22 U3.32 U3.48 U4.16 U15.1 X41.1 | length 275.7
  Top Layer w0.25: U1.54@-54.962,73.702 -53.414,75.25 -53.4,75.25 ; U1.42@-53.194,80.066 -52.15,79.05 ; U1.71@-48.951,67.691 -48.951,67.698 -47.8,68.85 ; U1.28@-48.244,85.016 -46.779,83.55 -46.75,83.55 ; v1(-46.45,35.8) -46.05,35.4 -46.05,34.688 R29.2@-46.05,34.65 ; -43,70.4 -43,69.872 U1.84@-42.234,69.106 ; -42,80.3 U1.13@-40.82,81.48 ; -39.45,74.8 -39.443,74.8 U1.96@-37.991,73.348 ; v1(-18.3,52.5) -18.2,52.6 -16.65,52.6 -16.4,52.35 ; U3.48@-17.608,53.595 -16.113,52.1 -15.25,52.1 ; -12.7,47.65 -12.7,48.6 ; -11.55,54.8 -11.55,54.809 U3.32@-10.289,56.07 ; v1@-9.9,52.95 -9.549,52.6 v1(-7.05,52.6) v1@-7,52.6 ; -9.799,52.15 U3.22@-8.522,50.872
  Top Layer w0.4: v1@-59.855,50.705 U4.16@-59.855,52.175 ; v1(-36,52) -36.05,52 -36.046,52.004 -36,52.004 R38.2@-35.091,52.004 ; v1(-19.2,76.5) -18.25,75.55 -18.25,69.9 -17.65,69.3 -16.85,69.3 -15.496,67.946 R33.2@-15.496,67.291 ; R45.2@-18.95,42.3 -16.104,42.3 -13.75,42.3 -13.55,42.5 -13.395,42.5 -10.15,42.5 -9.55,43.1 -9.55,44.75 -11.2,46.4 -11.95,46.4 -12.7,47.15 -12.7,47.65 ; v1(-2.25,76.6) -2.25,69.75 -2.3,69.7 0.095,69.7 R37.2@0.104,69.691 0.104,72.709 0.104,72.746 0.069,72.781 R51.2@0.05,72.8 ; R42.2@3.35,48.25 3.35,48.196 v1(3.35,46.85) 3.35,45.65 R44.2@3.4,45.6
  Top Layer w0.5: v1(-34.955,4) -35,4 -34.995,4.005 -34.955,4.005 U15.1@-33.2,4.005
  Top Layer w1: v1(-57.4,61.45) -55.8,59.85 -55.8,59.8 ; -55.85,59.8 -55.8,59.8 ; JP6.3@-47.26,0.5 -47.26,0.96 -52.325,6.025 -55.8,9.5 v1(-55.8,36.15) -55.8,50.7 v1(-55.8,51.95) -55.8,59.8
  Bottom Layer w0.4: v1(-59.85,50.7) v1(-55.85,50.7) ; v1@-46.8,36.15 v1(-46.45,35.8) ; v1@-36.021,51.979 v1(-36,52) ; v1(-9.95,52.9) -3.85,46.8 3.3,46.8 v1(3.35,46.85)
  Bottom Layer w0.5: v1(-55.8,36.15) v1@-46.8,36.15 ; v1(-55.8,51.95) -55.746,52.004 v1@-36.046,52.004 ; v1(-52.4,5.95) -52.35,6 X41.1@-41.8,6 -36.955,6 v1(-34.955,4) ; v1@-36,51.95 -28.4,51.95 -25.75,54.6 -14.95,54.6 v1(-14.45,54.1) ; v1(-35.5,76) -25.05,76 -24.6,76.45 -4.8,76.45 -4.55,76.7 -2.35,76.7 v1(-2.25,76.6)
  Bottom Layer w1: v1(-57.4,61.45) -57.4,62.95 -54.85,65.5 -53.3,65.5 v1(-48.6,70.2)
  other v1: -12.7,52.75 -43.75,73.35 -48.9,73.45 -48.8,79.55
+3V3A: C17.2 C33.2 R67.2 U1.10 U1.12 U19.5 | length 87.2
  Top Layer w0.25: v1(-43.5,79.5) -43.373,79.627 -41.226,79.627 ; U1.10@-39.759,80.419 -40.679,79.5 -41.1,79.5 -41.226,79.627 ; -39.15,82.45 -38.75,82.85 -38.75,83.65 -35.2,87.2 v1(-34.95,87.2) ; -39.146,82.446 U1.12@-40.466,81.126 -41.35,80.243 -41.35,79.75 -41.226,79.627
  Top Layer w0.4: v1(-75.45,84.5) -75.45,73.65 R67.2@-75.203,73.403 ; v1(-22.15,86.1) -20.85,86.1 U19.5@-20.4,85.65
  Bottom Layer w0.4: v1(-75.45,84.5) -73.55,84.5 -72.85,85.2 -69.25,85.2 -68.7,85.75 -61.45,85.75 -60.95,85.25 -59.9,85.25 -58.65,86.5 -53,86.5 -52.7,86.8 -42.1,86.8 -40.85,85.55 -39.75,85.55 -38.05,87.25 -34.95,87.25 -23.3,87.25 v1(-22.15,86.1) -20.503,86.1 -20.5,86.1 C17.2@-20.45,86.15 ; v1(-43.5,79.5) -43.5,79.606 C33.2@-42.603,80.503
+5V: C15.2 JP1.11 JP6.5 K1.4 Q2.2 R17.2 R18.2 R19.2 R30.2 R50.2 R68.2 R72.2 R73.1 R89.2 U2.19 U5.8 U7.6 U9.7 U19.1 U19.3 | length 321.6
  Top Layer w0.25: v1@-54.4,17.6 v1(-54.35,17.6)
  Top Layer w0.4: R19.2@-64.097,26.203 -63.203,26.203 -63.2,26.2 v1(-63.1,26.2) ; R18.2@-64.097,31.503 -63.303,31.503 v1(-63.3,31.5) ; v1(-62.95,104.25) v1@-62.95,104.3 ; v1(-58.4,38.4) -58.397,38.397 R17.2@-58.397,36.903 ; v1@-54.4,21.05 v1(-54.35,21) ; v1(-51.1,17.35) -51.087,17.337 R30.2@-51.087,16.207
  Top Layer w0.5: v1(-43.85,42.95) -43.75,42.95 -42.3,44.4 -40.55,44.4 -40.045,43.895 U9.7@-40.045,42.58 ; R89.2@-29.6,103.3 v1(-29.6,104.8) ; v1(-27.55,82.15) -27.535,82.165 U7.6@-27.535,83.85 ; v1(-21.4,82.15) -21.35,82.2 -18.5,82.2 -18.45,82.25 U19.3@-18.45,83.525 ; -20.4,82.2 -20.35,82.25 -20.35,83.45 U19.1@-20.3,83.45 ; v1(-7.05,83.85) -4.7,86.2 -4.7,100.8 -4.8,100.9 -4.8,103.8 v1@-5.45,104.45 ; Q2.2@-6.9,104.15 -6.65,104.4 v1(-5.4,104.4) ; -4.7,92.95 -3.3,92.95 -3.219,92.869 R50.2@-3.2,92.85
  Top Layer w0.7: -65.988,97.362 -65.788,97.362 -63.562,99.588 -63.562,99.788
  Top Layer w1: -65.988,97.362 -66.482,96.868 -66.65,96.7 -66.6,72.95 -62.125,68.475 -54.35,60.7 v1(-54.35,43.9) v1(-54.35,39.95) -54.35,31.5 -54.35,26.2 v1(-54.35,21) v1(-54.35,17.6) -54.35,10.13 JP6.5@-44.72,0.5 ; -63.562,99.788 -62.95,100.4 v1(-62.95,104.25) ; R73.1@-58.5,100.35 -55.95,100.35 -53.8,100.35 ; v1(-53.7,104.8) -53.7,98.35 -52.243,96.893 U2.19@-52.243,95.631
  Bottom Layer w0.4: v1(-63.3,31.5) v1(-54.3,31.5) ; v1(-63.1,26.2) v1(-54.4,26.2) ; v1(-58.4,38.4) -56.85,39.95 v1(-54.35,39.95) ; -52.35,43.85 -51.75,43.85 -50.6,42.7 -44.1,42.7 v1(-43.85,42.95)
  Bottom Layer w0.5: v1(-54.35,17.6) -51.35,17.6 v1(-51.1,17.35) ; v1(-54.35,43.9) -52.35,43.9 ; v1(-27.55,82.15) v1(-21.4,82.15) -8.75,82.15 v1(-7.05,83.85)
  Bottom Layer w0.6: JP1.11@-74.88,22.385 -71.235,22.385 -69.8,20.95 -54.35,20.95 -54.3,20.95 v1(-54.35,21) -45.15,21 -44.15,22 -44.15,22.09 -44.15,22.2 K1.4@-44.2,22.2
  Bottom Layer w1: v1(-62.95,104.25) -62.35,104.85 -53.7,104.85 R68.2@-46.8,104.85 ; v1(-46.7,104.75) R68.2@-46.8,104.85 ; v1(-5.4,104.4) -5.4,104.35 -5.425,104.375 -5.9,104.85 -46.697,104.85 -46.7,104.85 R68.2@-46.8,104.85
  other v1: -42.4,104.7
+5V_IZ: C27.2 C28.1 JP6.10 R47.1 R48.2 U14.16 | length 7.9
  Top Layer w0.4: v1@-22.45,2.75 -22.4,2.7 R48.2@-22.4,4.1 ; C28.1@-21.55,13.15 C28.1@-21.5,13.2 -21.3,13.4 v1(-20.4,13.4) -19.2,13.4 U14.16@-17.145,13.4 U14.16@-17.1,13.4 ; R47.1@-5.1,12.3 R47.1@-5.05,12.3 v1(-3.25,12.3)
  Bottom Layer w0.4: v1@-22.5,2.75 v1@-22.45,2.75
  other v1: -22.4,2.6
+IAKB: JP1.6 R62.1 R63.2 | length 51.1
  Top Layer w0.4: v1(-37.75,12.2) -37.8,12.25 -37.8,20.004 -37.8,20.05 -37.754,20.004 R62.1@-37.7,20.004 R63.2@-35.291,20.004 ; -34.45,20 -34.446,20.004
  Bottom Layer w0.4: JP1.6@-77.42,14.765 -76.205,13.55 -44.1,13.55 -42.75,12.2 v1(-37.75,12.2)
+UOUT: JP1.4 JP6.2 R56.2 | length 59.4
  Bottom Layer w0.5: R56.2@-80.45,30.9 -80.449,30.8 -80.4,15.205 JP1.4@-77.42,12.225
  Bottom Layer w0.7: -65.85,4.4 -65.6,4.4 -63.5,2.3 -63.5,2.1
  Bottom Layer w1: JP1.4@-77.42,12.225 -79.55,10.095 -79.55,7.35 -77.2,5 -66.45,5 -65.85,4.4 ; -63.5,2.1 -61.95,0.55 -53.05,0.55 -50.46,-2.04 JP6.2@-49.8,-2.04
-5V: C16.2 JP6.8 Q4.3 R90.1 U9.4 | length 173.8
  Top Layer w0.4: U9.4@-37.555,37.68 -37.555,37.505 -37.467,37.417 v1(-36.9,36.85) ; v1(-24.85,38.5) -25.15,38.8 -25.15,43.3 -25,43.45 -25,44.8 -21.2,48.6 -21.2,67.9 -20.4,68.7 v1(-20.4,79.45) ; v1(-9.9,80.15) -8.8,81.25 -8.8,81.85 ; -7.8,93.8 v1(-7.8,100.1)
  Top Layer w0.5: v1(-53,37.25) -53.05,37.2 -53.05,10.7 -43.45,1.1 -43.45,-0.77 JP6.8@-42.18,-2.04 ; v1(-33.05,36.15) -32.55,35.65 C16.2@-32.55,35.3 ; R90.1@-26.8,103.2 -26.65,103.05 Q4.3@-23.15,103.05 ; v1(-24.7,102.9) v1@-24.55,103.05 ; -8.8,81.85 -8.8,92.8 -7.8,93.8
  Bottom Layer w0.4: v1(-36.9,36.85) -36.9,36.9 v1@-36.55,37.25 ; v1(-20.4,79.45) -20,79.85 -12.45,79.85 -12.15,80.15 v1(-9.9,80.15)
  Bottom Layer w0.5: v1(-53,37.25) -26.1,37.25 v1(-24.85,38.5) ; -34.15,37.25 v1(-33.05,36.15) ; v1(-24.7,102.9) -24.75,102.95 -24.45,103.25 -10.95,103.25 v1(-7.8,100.1)
-5V_IZ: C28.2 C30.2 JP6.9 U8.2 U14.15 U15.7 U16.2 X12.1 X14.1